# EAGLE board Adapter-SOIC-16 (EAGLE 5.06)
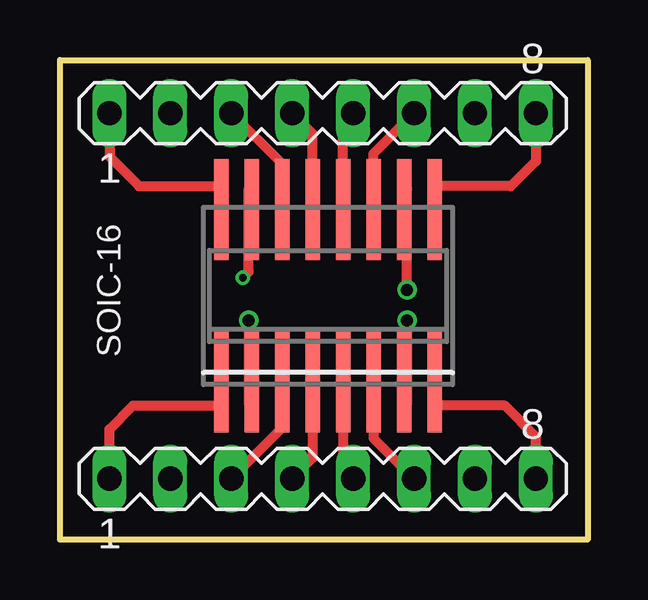
[diagram p0: board, top side]
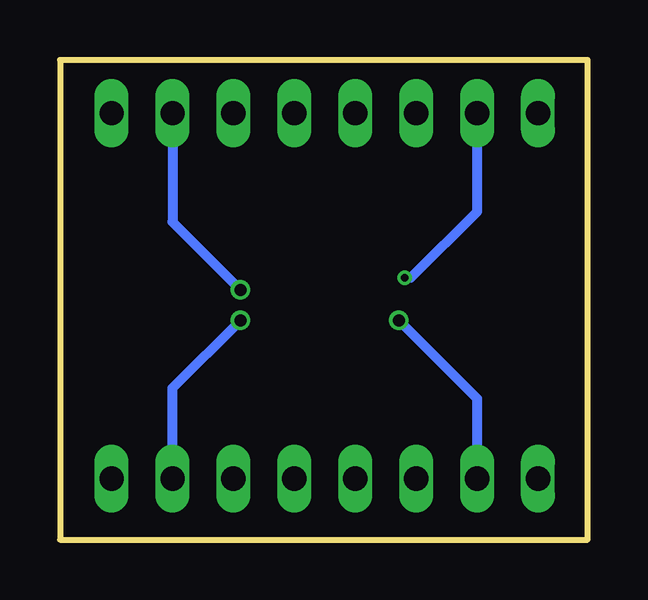
[diagram p1: board, bottom side, seen from below]

Size 22 x 20 mm. Coordinates in mm from the lower left corner, seen from the top.
Outline: 0,0 0,20 22,20 22,0 0,0
Copper layers (1*16): Top 0.035mm / dielectric 1.5mm / Bottom 0.035mm
Design rules "PCB-POOL": minimum track width 6mil, minimum drill 12mil, track to track 6mil, track to pad 6mil, pad to pad 6mil, via to via 6mil, smd to smd 6mil, copper to edge 20mil, drill to drill 8mil, minimum pad ring 8mil, minimum via ring 6mil, stop-mask expansion 3mil, vias tented up to drill 0mil, thermal gap 8mil

## Footprints (pad centres in the part's own frame; a part is rotated, then mirrored left to right if it is on the bottom)
MA08-1 = drill 1.016 long: 1 -8.89,0; 2 -6.35,0; 3 -3.81,0; 4 -1.27,0; 5 1.27,0; 6 3.81,0; 7 6.35,0; 8 8.89,0
SO-16DW = smd 0.6 x 2.2: 1 -4.445,-4.6; 2 -3.175,-4.6; 3 -1.905,-4.6; 4 -0.635,-4.6; 5 0.635,-4.6; 6 1.905,-4.6; 7 3.175,-4.6; 8 4.445,-4.6; 9 4.445,4.6; 10 3.175,4.6; 11 1.905,4.6; 12 0.635,4.6; 13 -0.635,4.6; 14 -1.905,4.6; 15 -3.175,4.6; 16 -4.445,4.6
SO16 = smd 0.6 x 2.2: 1 -4.445,-2.6; 2 -3.175,-2.6; 3 -1.905,-2.6; 4 -0.635,-2.6; 5 0.635,-2.6; 6 1.905,-2.6; 7 3.175,-2.6; 8 4.445,-2.6; 9 4.445,2.6; 10 3.175,2.6; 11 1.905,2.6; 12 0.635,2.6; 13 -0.635,2.6; 14 -1.905,2.6; 15 -3.175,2.6; 16 -4.445,2.6

## Placement (x,y rotation side)
E$1  [MA08-1]  10.95,17.78 0 top
E$2  [MA08-1]  10.95,2.54 0 top
E$3  [SO-16DW]  11.18,10.16 0 top
E$4  [SO16]  11.18,10.16 0 top

## Library data of the parts
E$1 E$2 = con-lstb
E$3 E$4 = ref-packages

## Nets
S$1: E$1.1 E$3.16
S$2: E$1.2 E$3.15
S$3: E$1.3 E$3.14
S$4: E$1.4 E$3.13
S$5: E$1.5 E$3.12
S$6: E$1.6 E$3.11
S$7: E$1.7 E$3.10
S$8: E$1.8 E$3.9
S$9: E$2.1 E$3.1
S$10: E$2.2 E$3.2
S$11: E$2.3 E$3.3
S$12: E$2.4 E$3.4
S$13: E$2.5 E$3.5
S$14: E$2.6 E$3.6
S$15: E$2.7 E$3.7
S$16: E$2.8 E$3.8

## Tracks (layer width: path | path; a pad name or v marks a point on that pad's centre or on a via)
S$1
  Top 0.406: E$1.1 2.06,15.97 3.3,14.73 6.7,14.73 E$3.16
S$2  (via drill 0.3)
  Top 0.406: E$3.15 7.87,14.63 7.87,11.18 v7.62,10.92
  Bottom 0.406: E$1.2 4.6,13.68 7.37,10.92 v7.62,10.92
S$3
  Top 0.406: E$3.14 9.27,15.65 E$1.3
S$4
  Top 0.406: E$3.13 10.54,16.92 E$1.4
S$5
  Top 0.406: E$3.12 11.81,17.37 E$1.5
S$6
  Top 0.406: E$3.11 13.08,16.1 E$1.6
S$7  (via drill 0.5)
  Top 0.406: v14.48,10.41 14.48,14.63 E$3.10
  Bottom 0.406: E$1.7 17.3,13.24 v14.48,10.41
S$8
  Top 0.406: E$1.8 19.84,15.78 18.8,14.73 15.65,14.73 E$3.9
S$9
  Top 0.406: E$2.1 2.06,4.6 3.05,5.59 6.7,5.59 E$3.1
S$10  (via drill 0.5)
  Top 0.406: v7.87,9.14 7.87,5.69 E$3.2
  Bottom 0.406: E$2.2 4.6,5.87 v7.87,9.14
S$11
  Top 0.406: E$3.3 9.27,4.67 E$2.3
S$12
  Top 0.406: E$3.4 10.54,3.4 E$2.4
S$13
  Top 0.406: E$3.5 11.81,2.95 E$2.5
S$14
  Top 0.406: E$3.6 13.08,4.22 E$2.6
S$15  (via drill 0.5)
  Top 0.406: v14.48,9.14 14.48,5.69 E$3.7
  Bottom 0.406: E$2.7 17.3,6.32 v14.48,9.14
S$16
  Top 0.406: E$2.8 19.84,4.29 18.54,5.59 15.65,5.59 E$3.8

## Text on the board
tNames: SOIC-16